# Altium PCB Mini51.PcbDoc
Units mil, origin at the board's own origin, x right, y up, seen from the top; angles counter-clockwise.
Board outline 2000 x 2240 mil, 2 copper layers (Top Layer, Bottom Layer); 47 components, 38 nets, 160 pads, 8 vias.
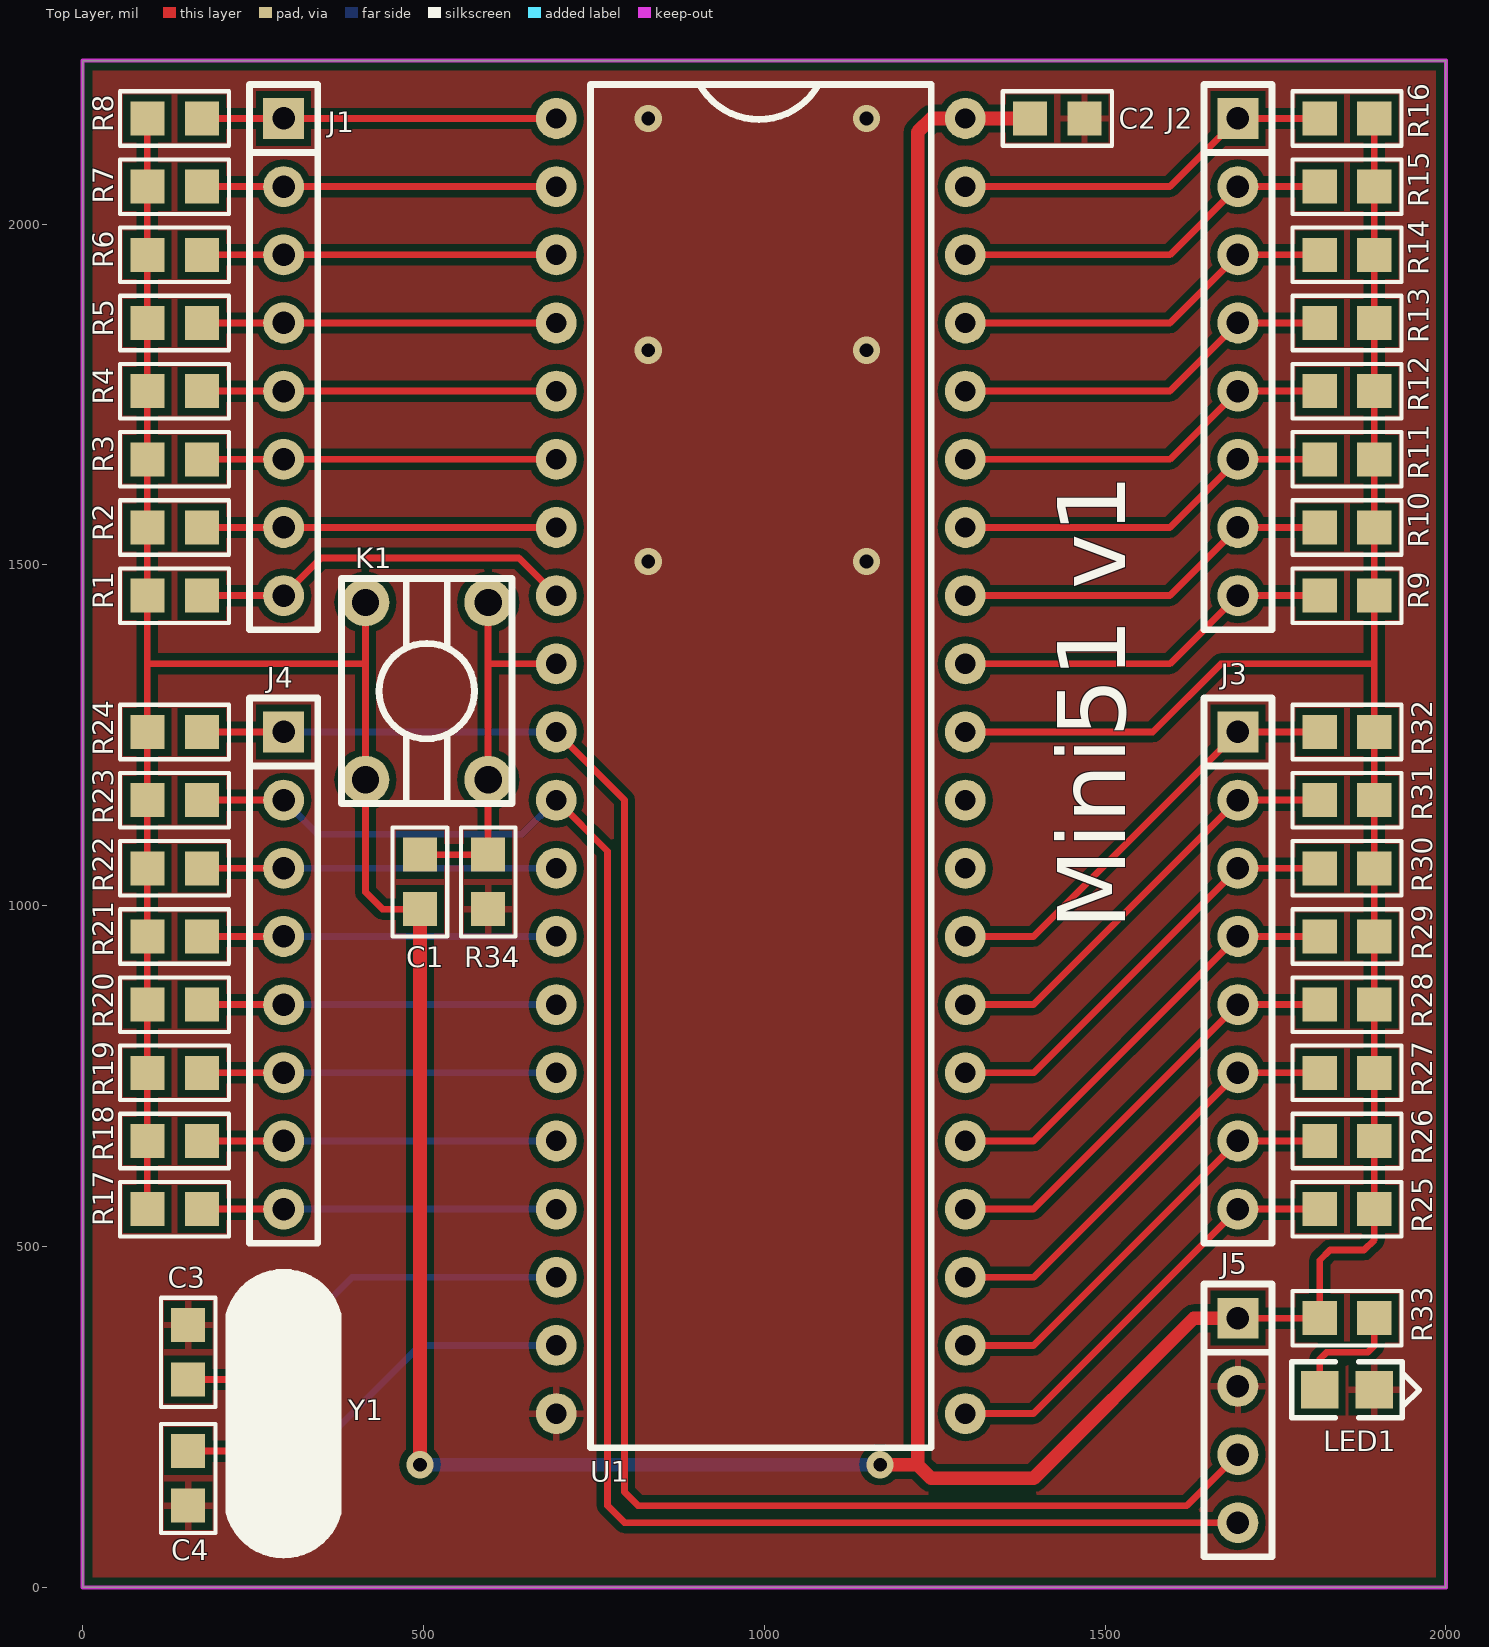
[diagram p0: Top Layer view]
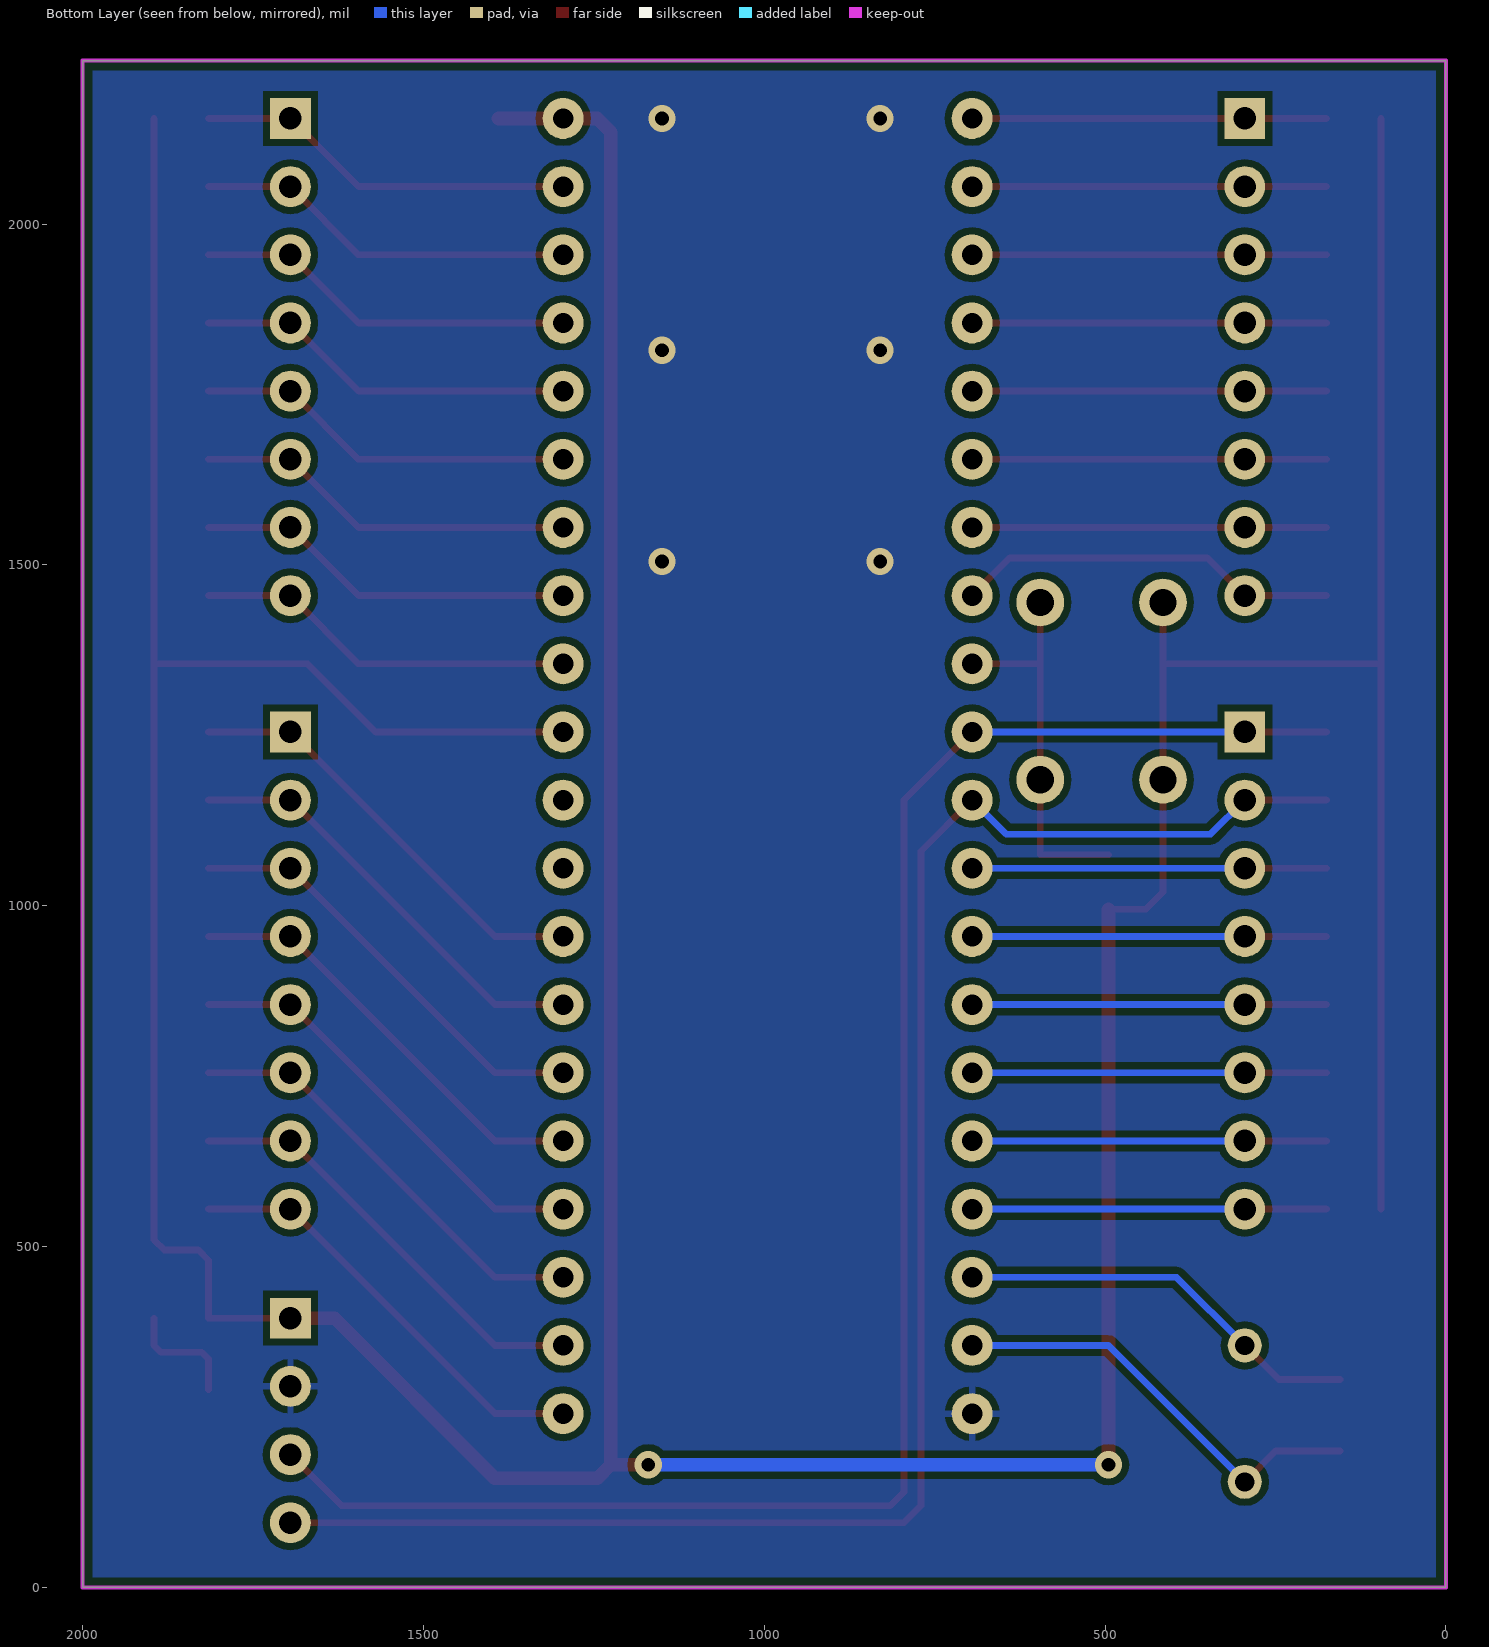
[diagram p1: Bottom Layer view, seen from below]

## Layer stack, top to bottom
Top Layer: signal copper 1.4
Dielectric: dielectric 12.6, FR-4, Dk 4.8
Bottom Layer: signal copper 1.4

## Board outline
0,2240 2000,2240 2000,0 0,0 0,2240

## Design rules (kind name [scope] priority, off if disabled: settings)
Clearance [All] p1: gap=10
PolygonConnect [All] p1: connectstyle=Relief reliefconductorwidth=10 reliefentries=4 polygonreliefangle="90 Angle"
RoutingVias [All] p1: holewidth=28 width=50 viastyle="Through Hole" minholewidth=28 minwidth=50 maxholewidth=28 maxwidth=50
SilkscreenOverComponentPads [All] p1: minsilkscreentomaskgap=10
SolderMaskExpansion [All] p1: expansion=4
Width [All] p1: maxlimit=100 minlimit=10 preferedwidth=10
27 further rules are at their usual default settings.

## Components (designator, comment, footprint, x,y, rotation, side; value= is the part's Value field where it differs from the comment)
C1 "0.1uF" 0805 495,1075 r270 top
C2 "0.1uF" 0805 1470,2155 r180 top
C3 "22pF" 0805 155,120 r90 top
C4 "22pF" 0805 155,385 r270 top
J1 "CON8" SIP8 295,2155 r270 top
J2 "CON8" SIP8 1695,2155 r270 top
J3 "CON8" SIP8 1695,1255 r270 top
J4 "CON8" SIP8 295,1255 r270 top
J5 "CON4" SIP4 1695,395 r270 top
K1 "KEY" KEY-6*6 505,1315 r90 top
LED1 "LED" 0805LD 1815,290 r0 top
R1 "10K" 0805 175,1455 r180 top
R2 "10K" 0805 175,1555 r180 top
R3 "10K" 0805 175,1655 r180 top
R4 "10K" 0805 175,1755 r180 top
R5 "10K" 0805 175,1855 r180 top
R6 "10K" 0805 175,1955 r180 top
R7 "10K" 0805 175,2055 r180 top
R8 "10K" 0805 175,2155 r180 top
R9 "10K" 0805 1815,1455 r0 top
R10 "10K" 0805 1815,1555 r0 top
R11 "10K" 0805 1815,1655 r0 top
R12 "10K" 0805 1815,1755 r0 top
R13 "10K" 0805 1815,1855 r0 top
R14 "10K" 0805 1815,1955 r0 top
R15 "10K" 0805 1815,2055 r0 top
R16 "10K" 0805 1815,2155 r0 top
R17 "10K" 0805 95,555 r0 top
R18 "10K" 0805 95,655 r0 top
R19 "10K" 0805 95,755 r0 top
R20 "10K" 0805 95,855 r0 top
R21 "10K" 0805 95,955 r0 top
R22 "10K" 0805 95,1055 r0 top
R23 "10K" 0805 95,1155 r0 top
R24 "10K" 0805 95,1255 r0 top
R25 "10K" 0805 1895,555 r180 top
R26 "10K" 0805 1895,655 r180 top
R27 "10K" 0805 1895,755 r180 top
R28 "10K" 0805 1895,855 r180 top
R29 "10K" 0805 1895,955 r180 top
R30 "10K" 0805 1895,1055 r180 top
R31 "10K" 0805 1895,1155 r180 top
R32 "10K" 0805 1895,1255 r180 top
R33 "1K" 0805 1895,395 r180 top
R34 "10K" 0805 595,995 r90 top
U1 "STC89C52RC" DIP40 695,2155 r0 top
Y1 "CRYSTAL" XTAL-2 295,155 r90 top

## Footprints (in the part's own frame and the unit in brackets; to place one, negate y for a bottom-side part, rotate by r counter-clockwise, add the part's x,y. Pads: shape width x height; smd on the part's side, far side on the other; paste and mask are expansions set on the pad)
0805 [mil]
  rect 50x50 smd: 1(0,0) 2(80,0)
  silkscreen extent -40,-40 120,40
0805LD [mil] "SMD LED, Imperial-0805, Metric-2012"
  rect 55x55 smd: A(0,0) K(80,0)
  silkscreen extent -41,-41 146,41
DIP40 [mil]
  round 60 hole 30: 1(0,0) 2(0,-100) 3(0,-200) 4(0,-300) 5(0,-400) 6(0,-500) 7(0,-600) 8(0,-700) 9(0,-800) 10(0,-900) 11(0,-1000) 12(0,-1100) 13(0,-1200) 14(0,-1300) 15(0,-1400) 16(0,-1500) 17(0,-1600) 18(0,-1700) 19(0,-1800) 20(0,-1900) 21(600,-1900) 22(600,-1800) 23(600,-1700) 24(600,-1600) 25(600,-1500) 26(600,-1400) 27(600,-1300) 28(600,-1200) 29(600,-1100) 30(600,-1000) 31(600,-900) 32(600,-800) 33(600,-700) 34(600,-600) 35(600,-500) 36(600,-400) 37(600,-300) 38(600,-200) 39(600,-100) 40(600,0)
  silkscreen extent 50,-1950 550,50
KEY-6*6 [mil]
  round 70 hole 40: 1(-130,-90) 1(130,-90) 2(-130,90) 2(130,90)
  silkscreen extent -165,-125 165,125
SIP4 [mil]
  rect 60x60 hole 33: 1(0,0)
  round 60 hole 33: 2(100,0) 3(200,0) 4(300,0)
  silkscreen extent -50,-50 350,50
SIP8 [mil]
  rect 60x60 hole 33: 1(0,0)
  round 60 hole 33: 2(100,0) 3(200,0) 4(300,0) 5(400,0) 6(500,0) 7(600,0) 8(700,0)
  silkscreen extent -50,-50 750,50
XTAL-2 [mil]
  round 50 hole 28: 1(0,0) 2(200,0)
  silkscreen extent -107,-80 307,80

## Part data
C1 C2 C3 C4: library part CAP
J1 J2 J3 J4: "Connector 8p"
K1: "push-button"
LED1: "Light-Emitting Diode"
R1 R2 R3 R4 R5 R6 R7 R8 R9 R10 R11 R12 R13 R14 R15 R16 R17 R18 R19 R20 R21 R22 R23 R24 R25 R26 R27 R28 R29 R30 R31 R32 R33 R34: library part RES
U1: library part STC89C52
Y1: "Crystal"

## Via types
v1: diameter 40, hole 20, Top Layer to Bottom Layer, 8 vias

## Nets (pads, with @x,y where several pads share a name; then routed paths per layer and width w, separated by ;. In a path a pad name is that pad's centre, name@x,y a point inside that pad or via, vN(x,y) a via of type N, cw(c..) or ccw(c..) an arc to the next point about the centre after c; other vN are vias at no path point)
+5V: C1.2 C2.2 J5.1 K1.2 R1.2 R2.2 R3.2 R4.2 R5.2 R6.2 R7.2 R8.2 R9.2 R10.2 R11.2 R12.2 R13.2 R14.2 R15.2 R16.2 R17.1 R18.1 R19.1 R20.1 R21.1 R22.1 R23.1 R24.1 R25.1 R26.1 R27.1 R28.1 R29.1 R30.1 R31.1 R32.1 R33.2 U1.31 U1.40 | length 9268.1
  Top Layer w10: R17.1 R18.1 R19.1 R20.1 R21.1 R22.1 R23.1 R24.1 95,1355 ; R8.2 R7.2 R6.2 R5.2 R4.2 R3.2 R2.2 R1.2 95,1355 ; K1.2@415,1445 415,1355 ; C1.2 440,995 415,1020 415,1185 415,1355 ; U1.31 1570,1255 1670,1355 1895,1355 ; J5.1 R33.2 1815,480 1830,495 1880,495 1895,510 R25.1 R26.1 R27.1 R28.1 R29.1 R30.1 R31.1 R32.1 1895,1355 ; R16.2 R15.2 R14.2 R13.2 R12.2 R11.2 R10.2 R9.2 1895,1355 ; 95,1355 415,1355
  Top Layer w20: v1(495,180) C1.2 ; v1(1170,180) 1225,180 ; C2.2 U1.40 1245,2155 1225,2135 1225,180 ; J5.1 1630,395 1395,160 1245,160 1225,180
  Bottom Layer w20: v1(495,180) v1(1170,180)
GND: C2.1 C3.1 C4.1 J5.2 LED1.K R34.1 U1.20
  other v1: 830,1505 1150,1505 830,1815 1150,1815 830,2155 1150,2155
NetJ1_1: J1.1 R8.1 U1.1 | length 520
  Top Layer w10: R8.1 J1.1 U1.1
NetJ1_2: J1.2 R7.1 U1.2 | length 520
  Top Layer w10: R7.1 J1.2 U1.2
NetJ1_3: J1.3 R6.1 U1.3 | length 520
  Top Layer w10: R6.1 J1.3 U1.3
NetJ1_4: J1.4 R5.1 U1.4 | length 520
  Top Layer w10: R5.1 J1.4 U1.4
NetJ1_5: J1.5 R4.1 U1.5 | length 520
  Top Layer w10: R4.1 J1.5 U1.5
NetJ1_6: J1.6 R3.1 U1.6 | length 520
  Top Layer w10: R3.1 J1.6 U1.6
NetJ1_7: J1.7 R2.1 U1.7 | length 520
  Top Layer w10: R2.1 J1.7 U1.7
NetJ1_8: J1.8 R1.1 U1.8 | length 565.6
  Top Layer w10: R1.1 J1.8 350,1510 640,1510 U1.8
NetJ2_1: J2.1 R16.1 U1.39 | length 561.4
  Top Layer w10: U1.39 1595,2055 J2.1 R16.1
NetJ2_2: J2.2 R15.1 U1.38 | length 561.4
  Top Layer w10: U1.38 1595,1955 J2.2 R15.1
NetJ2_3: J2.3 R14.1 U1.37 | length 561.4
  Top Layer w10: U1.37 1595,1855 J2.3 R14.1
NetJ2_4: J2.4 R13.1 U1.36 | length 561.4
  Top Layer w10: U1.36 1595,1755 J2.4 R13.1
NetJ2_5: J2.5 R12.1 U1.35 | length 561.4
  Top Layer w10: U1.35 1595,1655 J2.5 R12.1
NetJ2_6: J2.6 R11.1 U1.34 | length 561.4
  Top Layer w10: U1.34 1595,1555 J2.6 R11.1
NetJ2_7: J2.7 R10.1 U1.33 | length 561.4
  Top Layer w10: U1.33 1595,1455 J2.7 R10.1
NetJ2_8: J2.8 R9.1 U1.32 | length 561.4
  Top Layer w10: U1.32 1595,1355 J2.8 R9.1
NetJ3_1: J3.1 R32.2 U1.28 | length 644.3
  Top Layer w10: U1.28 1395,955 J3.1 R32.2
NetJ3_2: J3.2 R31.2 U1.27 | length 644.3
  Top Layer w10: U1.27 1395,855 J3.2 R31.2
NetJ3_3: J3.3 R30.2 U1.26 | length 644.3
  Top Layer w10: U1.26 1395,755 J3.3 R30.2
NetJ3_4: J3.4 R29.2 U1.25 | length 644.3
  Top Layer w10: U1.25 1395,655 J3.4 R29.2
NetJ3_5: J3.5 R28.2 U1.24 | length 644.3
  Top Layer w10: U1.24 1395,555 J3.5 R28.2
NetJ3_6: J3.6 R27.2 U1.23 | length 644.3
  Top Layer w10: U1.23 1395,455 J3.6 R27.2
NetJ3_7: J3.7 R26.2 U1.22 | length 644.3
  Top Layer w10: U1.22 1395,355 J3.7 R26.2
NetJ3_8: J3.8 R25.2 U1.21 | length 644.3
  Top Layer w10: U1.21 1395,255 J3.8 R25.2
NetJ4_3: J4.3 R22.2 U1.12 | length 520
  Top Layer w10: R22.2 J4.3
  Bottom Layer w10: J4.3 U1.12
NetJ4_4: J4.4 R21.2 U1.13 | length 520
  Top Layer w10: R21.2 J4.4
  Bottom Layer w10: J4.4 U1.13
NetJ4_5: J4.5 R20.2 U1.14 | length 520
  Top Layer w10: R20.2 J4.5
  Bottom Layer w10: J4.5 U1.14
NetJ4_6: J4.6 R19.2 U1.15 | length 520
  Top Layer w10: R19.2 J4.6
  Bottom Layer w10: J4.6 U1.15
NetJ4_7: J4.7 R18.2 U1.16 | length 520
  Top Layer w10: R18.2 J4.7
  Bottom Layer w10: J4.7 U1.16
NetJ4_8: J4.8 R17.2 U1.17 | length 520
  Top Layer w10: R17.2 J4.8
  Bottom Layer w10: J4.8 U1.17
NetLED1_A: LED1.A R33.1 | length 173.3
  Top Layer w10: LED1.A 1815,335 1825,345 1885,345 1895,355 R33.1
RST: C1.1 K1.1 R34.2 U1.9 | length 570
  Top Layer w10: C1.1 R34.2 595,1185 595,1355 ; K1.1@595,1445 595,1355 ; U1.9 595,1355
RXD: J4.1 J5.3 R24.2 U1.10 | length 2615.8
  Top Layer w10: R24.2 J4.1 ; U1.10 795,1155 795,140 815,120 1620,120 J5.3
  Bottom Layer w10: J4.1 U1.10
TXD: J4.2 J5.4 R23.2 U1.11 | length 2562.8
  Top Layer w10: R23.2 J4.2 ; U1.11 770,1080 770,120 795,95 J5.4
  Bottom Layer w10: J4.2 345,1105 645,1105 U1.11
XTAL1: C3.2 U1.19 Y1.1 | length 641.5
  Top Layer w10: C3.2 250,200 Y1.1
  Bottom Layer w10: Y1.1 495,355 U1.19
XTAL2: C4.2 U1.18 Y1.2 | length 602.1
  Top Layer w10: C4.2 245,305 Y1.2
  Bottom Layer w10: Y1.2 395,455 U1.18
pads on no net: U1.29 U1.30

## Polygon pours and split planes (outlines as drawn)
GND on Top Layer "Top Layer-GND" (solid, remove dead copper): 15,2225 1985,2225 1985,15 15,15
GND on Bottom Layer "Top Layer-GND" (solid, remove dead copper): 15,2225 1985,2225 1985,15 15,15

## Keep-outs
Keep-Out Layer:
  the board outline again, w6

## Silkscreen, mask and mechanical layers (free items; w line width, h text height)
Top Overlay:
  text "Mini51 v1" at 1530,965 h100 r90
Mechanical 1:
  the board outline again, w6